# EAGLE board Two stage power demo(power routed) (EAGLE 5.10)
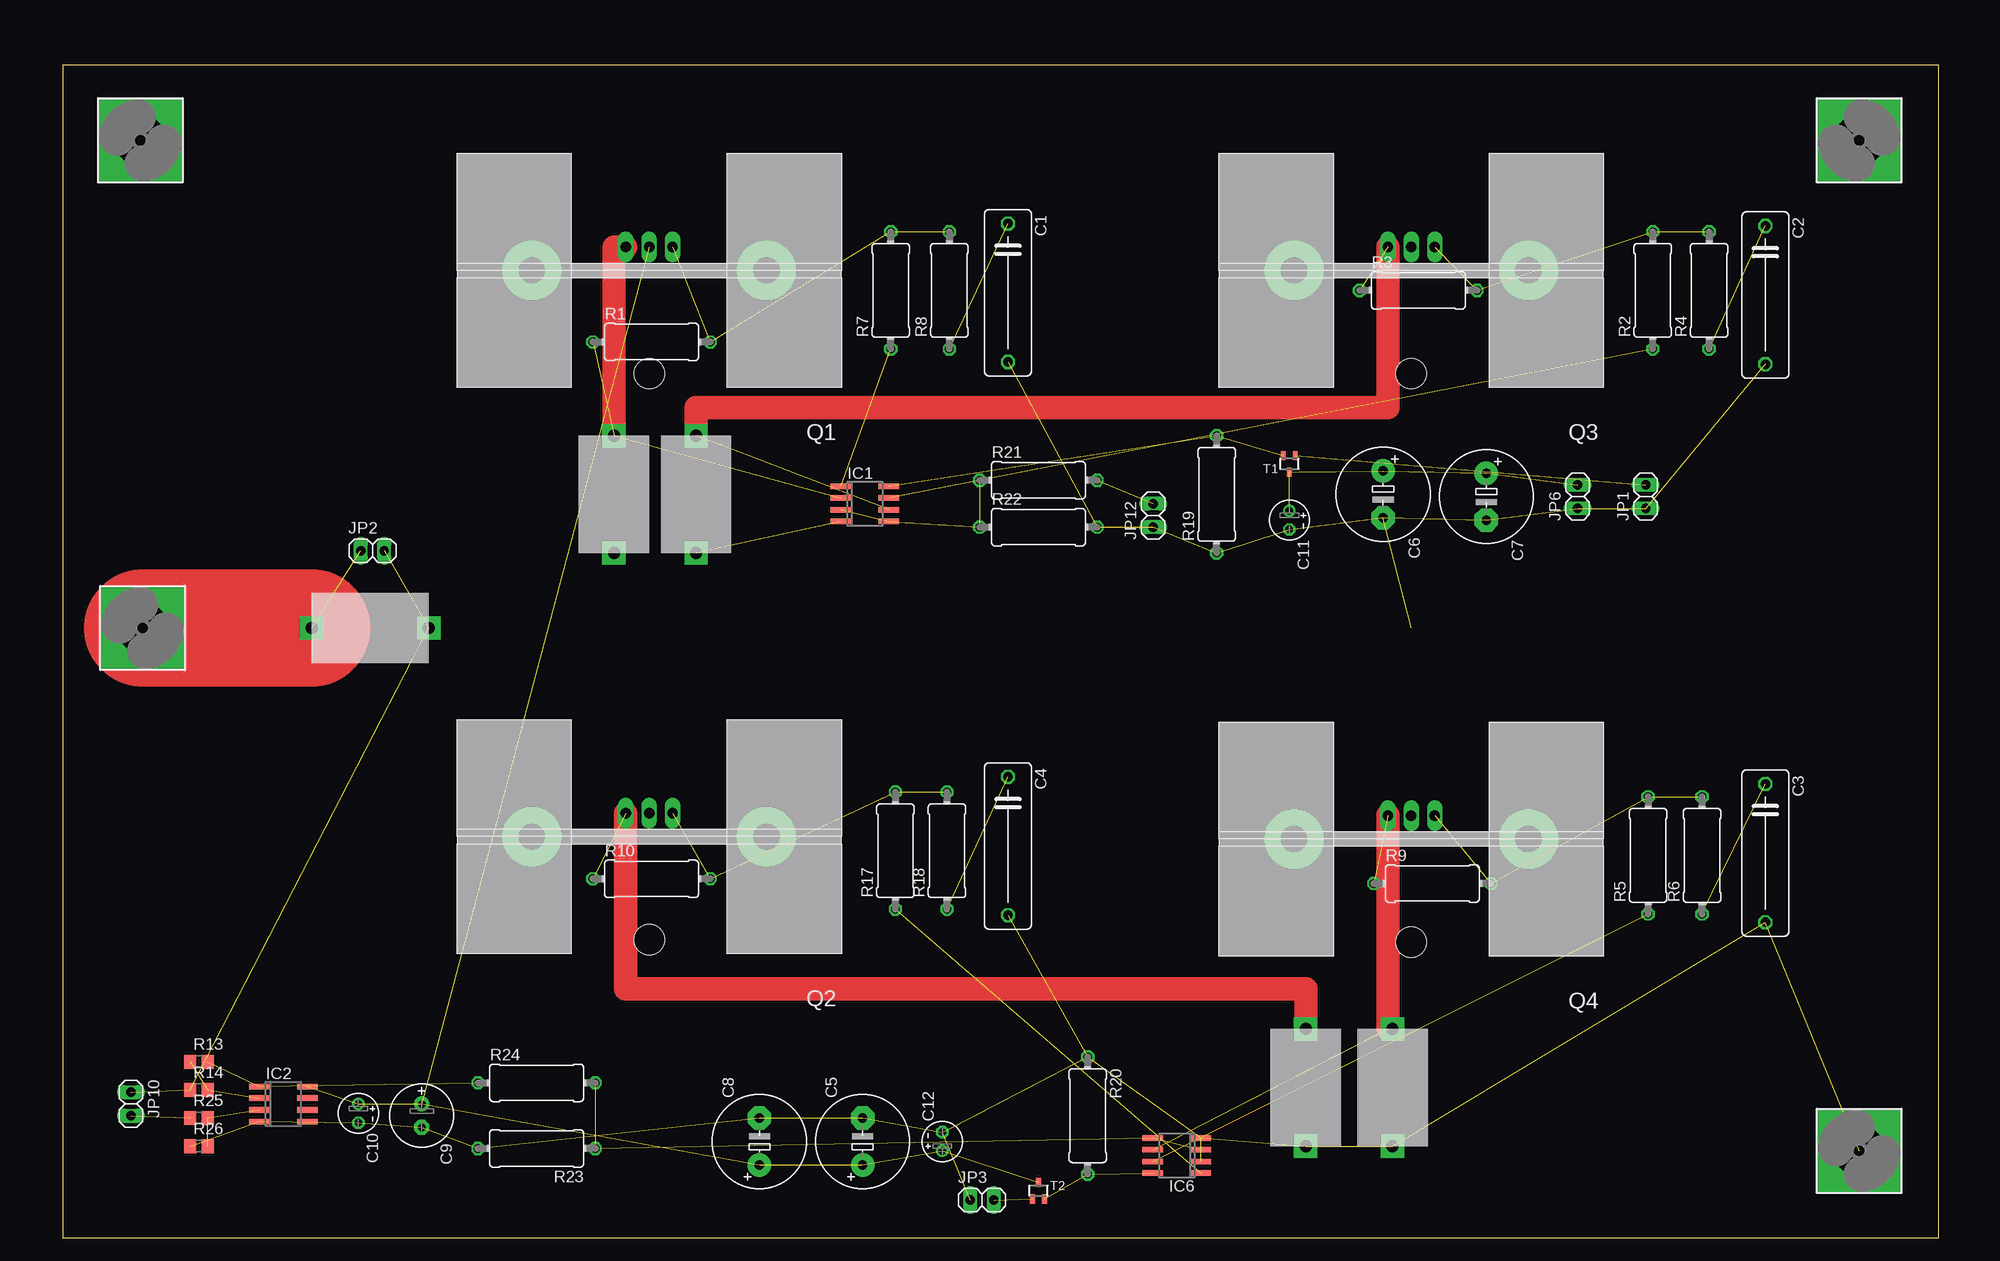
[diagram p0: board, top side]
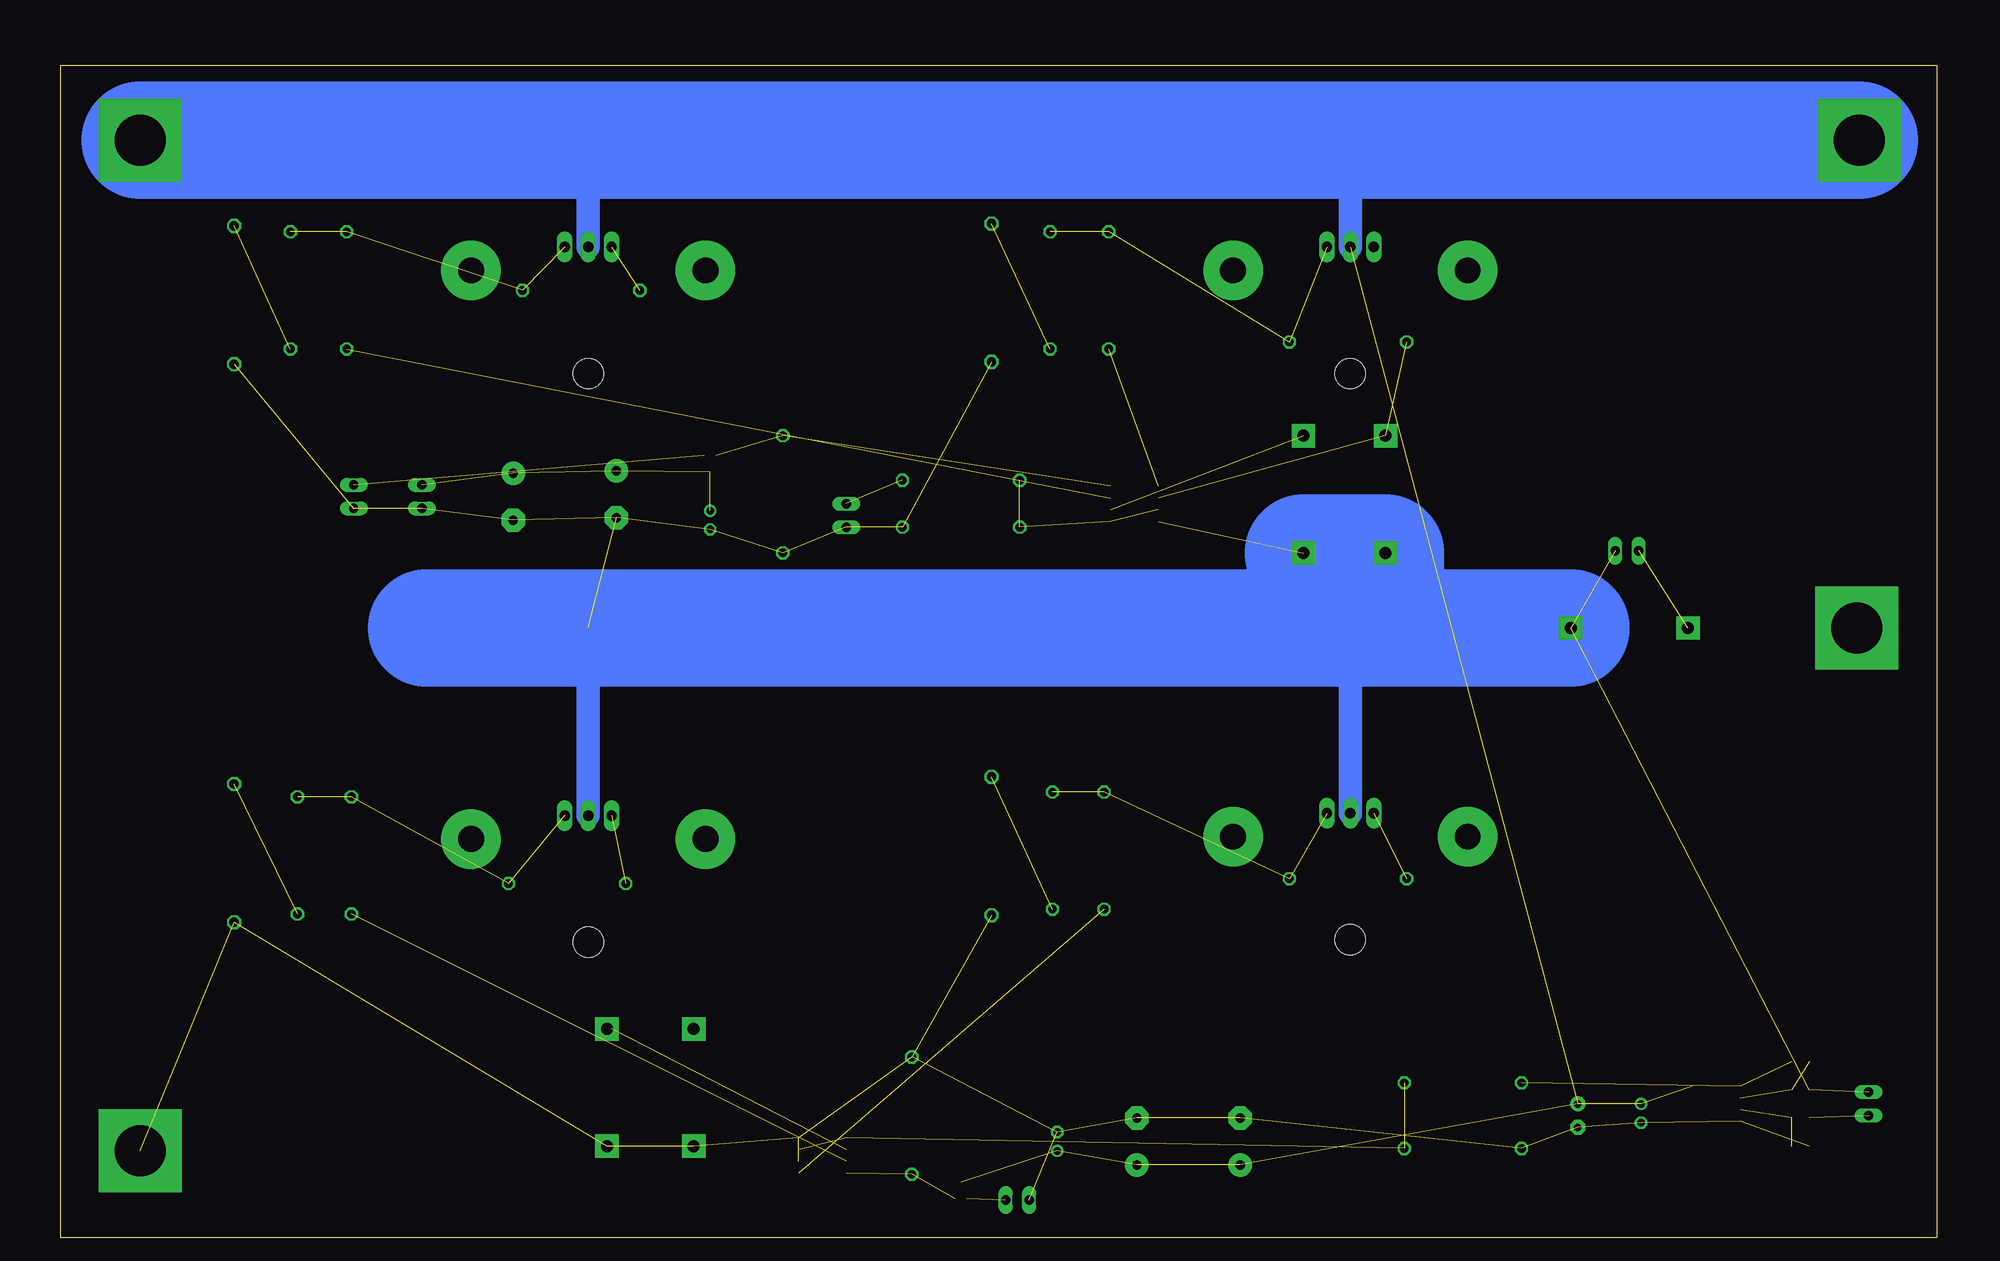
[diagram p1: board, bottom side, seen from below]

Size 203.2 x 127 mm. Coordinates in mm from the lower left corner, seen from the top.
Outline: 0,0 203.2,0 203.2,127 0,127 0,0
Copper layers (1*16): Top 0.035mm / dielectric 1.5mm / Bottom 0.035mm
Design rules "default *": minimum track width 16mil, minimum drill 24mil, track to track 8mil, track to pad 8mil, pad to pad 8mil, via to via 8mil, smd to smd 8mil, copper to edge 40mil, drill to drill 8mil, minimum pad ring 10mil, minimum via ring 8mil, stop-mask expansion 4mil, vias tented up to drill 0mil, thermal gap 10mil

## Footprints (pad centres in the part's own frame; a part is rotated, then mirrored left to right if it is on the bottom)
630HR050E = drill 1.3 pad 2.54 square: P$1 -6.35,0; P$2 6.35,0
5,5-PAD-SQUARE = drill 5.5 pad 9 square: B5,5 0,0
C150-054X183 = drill 1.016 octagon: 1 -7.493,0; 2 7.493,0
E5-10,5 = drill 1.016 pad 2.54 round: + -2.54,0 | drill 1.016 pad 2.54 octagon: - 2.54,0
E2,5-7 = drill 0.813 pad 1.6 round: + -1.27,0 | drill 0.813 pad 1.6 octagon: - 1.27,0
E2-4 = drill 0.813 pad 1.27 round: + -1.016,0 | drill 0.813 pad 1.27 octagon: - 1.016,0
SO08 = smd 0.6 x 2.2: 1 -1.905,-2.6; 2 -0.635,-2.6; 3 0.635,-2.6; 4 1.905,-2.6; 5 1.905,2.6; 6 0.635,2.6; 7 -0.635,2.6; 8 -1.905,2.6
1X02 = drill 1.016 long: 1 -1.27,0; 2 1.27,0
TO220-W/657-20ABP = drill 1.118 long: 1 -2.54,-2.54; 2 0,-2.54; 3 2.54,-2.54 | drill 2.8 pad 6.452 round: P$1 -12.7,0; P$2 12.7,0 | hole 3.302: 0,11.176
0411/12 = drill 0.914 octagon: 1 -6.35,0; 2 6.35,0
R0805 = smd 1.3 x 1.5: 1 -0.95,0; 2 0.95,0
SOT323 = smd 0.5 x 1: 1 0,0.9; 2 -0.65,-0.9; 3 0.65,-0.9

## Placement (x,y rotation side)
1  630HR050E  [630HR050E]  59.69,80.52 90 top
BATTERY-  MOUNT-PAD-SQUARE5.5  [5,5-PAD-SQUARE]  8.64,66.04 90 top
BATTERY/CHARGER+  MOUNT-PAD-SQUARE5.5  [5,5-PAD-SQUARE]  8.38,118.87 90 top
BATTERY/CHARGER+1  MOUNT-PAD-SQUARE5.5  [5,5-PAD-SQUARE]  194.56,118.87 0 top
C1  [C150-054X183]  102.36,102.36 270 top
C2  [C150-054X183]  184.4,102.11 270 top
C3  [C150-054X183]  184.4,41.66 270 top
C4  [C150-054X183]  102.36,42.42 270 top
C5  470u  [E5-10,5]  86.61,10.41 90 top
C6  470u  [E5-10,5]  143,80.52 270 top
C7  470u  [E5-10,5]  154.18,80.26 270 top
C8  470u  [E5-10,5]  75.44,10.41 90 top
C9  100u  [E2,5-7]  38.86,13.21 270 top
C10  0.1u  [E2-4]  32,13.46 270 top
C11  0.1u  [E2-4]  132.84,77.72 270 top
C12  0.1u  [E2-4]  95.25,10.41 90 top
CHARGER-  MOUNT-PAD-SQUARE5.5  [5,5-PAD-SQUARE]  194.56,9.4 90 top
IC1  OPA2277U  [SO08]  86.87,79.5 270 top
IC2  OPA2277U  [SO08]  23.88,14.48 270 top
IC6  OPA2277U  [SO08]  120.65,8.89 90 top
JP1  [1X02]  171.45,80.26 90 top
JP2  [1X02]  33.53,74.42 0 top
JP3  [1X02]  99.57,4.06 0 top
JP6  [1X02]  164.08,80.26 90 top
JP10  [1X02]  7.37,14.48 270 top
JP12  [1X02]  118.11,78.23 90 top
Q1  RFP12N10L  [TO220-W/657-20ABP]  63.5,104.78 180 top
Q2  RFP12N10L  [TO220-W/657-20ABP]  63.5,43.43 180 top
Q3  RFP12N10L  [TO220-W/657-20ABP]  146.05,104.78 180 top
Q4  RFP12N10L  [TO220-W/657-20ABP]  146.05,43.18 180 top
R1  100k  [0411/12]  63.75,97.03 0 top
R2  [0411/12]  172.21,102.62 90 top
R3  100k  [0411/12]  146.81,102.62 0 top
R4  [0411/12]  178.31,102.62 90 top
R5  [0411/12]  171.7,41.4 90 top
R6  [0411/12]  177.55,41.4 90 top
R7  [0411/12]  89.66,102.62 90 top
R8  [0411/12]  96.01,102.62 90 top
R9  100k  [0411/12]  148.34,38.35 0 top
R10  100k  [0411/12]  63.75,38.86 0 top
R13  100k  [R0805]  14.73,19.05 0 top
R14  100k  [R0805]  14.73,16 0 top
R17  [0411/12]  90.17,41.91 90 top
R18  [0411/12]  95.76,41.91 90 top
R19  [0411/12]  124.97,80.52 90 top
R20  [0411/12]  111,13.21 270 top
R21  15k  [0411/12]  105.66,82.04 0 top
R22  1k  [0411/12]  105.66,76.96 0 top
R23  1k  [0411/12]  51.31,9.65 180 top
R24  15k  [0411/12]  51.31,16.76 0 top
R25  100k  [R0805]  14.73,12.95 0 top
R26  100k  [R0805]  14.73,9.91 0 top
T1  [SOT323]  132.84,83.82 180 top
T2  [SOT323]  105.66,5.08 0 top
U$2  630HR050E  [630HR050E]  33.27,66.04 0 top
U$3  630HR050E  [630HR050E]  134.62,16.26 90 top
U$4  630HR050E  [630HR050E]  68.58,80.52 90 top
U$5  630HR050E  [630HR050E]  144.02,16.26 90 top

## Library data of the parts
1 Q1-Q4 U$2-U$5 = NEWPARTS
BATTERY- BATTERY/CHARGER+ BATTERY/CHARGER+1 CHARGER- = holes
C1-C12 R1-R10 R13 R14 R17-R26 = rcl
IC1 IC2 IC6 = linear
JP1-JP3 JP6 JP10 JP12 = pinhead
T1 T2 = zetex

## Nets
+5V: C6.+ C7.+ C11.+ JP6.2 T1.1
GND: 1.P$1 C1.2 C2.2 C6.- C7.- C11.- IC1.4 JP1.1 JP2.2 JP6.1 JP10.1 JP12.1 Q2.2 Q4.2 R14.1 R19.1 R22.2 U$2.P$2 U$4.P$1
LOAD: BATTERY/CHARGER+1.B5,5 BATTERY/CHARGER+.B5,5 C5.+ C8.+ C9.+ C10.+ C12.+ IC2.8 Q1.2 Q3.2 T2.1
N$1: IC1.7 R2.1
N$2: Q2.3 R10.1 U$3.P$2
N$3: C3.2 C4.2 C5.- C8.- C9.- C10.- C12.- CHARGER-.B5,5 IC2.4 IC6.2 IC6.4 JP3.1 R20.1 R23.2 R26.1 U$3.P$1 U$5.P$1
N$4: IC2.2 R13.1 R14.2
N$5: BATTERY-.B5,5 JP2.1 U$2.P$1
N$6: IC1.8 R19.2 T1.3
N$7: JP1.2 T1.2
N$8: IC2.1 R13.2 R24.1
N$9: IC1.6 Q3.3 R3.1 U$4.P$2
N$10: Q1.1 R1.2 R7.2 R8.2
N$11: IC1.3 IC1.5 R21.1 R22.1
N$12: IC6.6 Q4.3 R9.1 U$5.P$2
N$13: C1.1 R8.1
N$14: Q3.1 R2.2 R3.2 R4.2
N$15: C2.1 R4.1
N$16: Q4.1 R5.2 R6.2 R9.2
N$18: C3.1 R6.1
N$19: IC2.3 R25.2 R26.2
N$20: Q2.1 R10.2 R17.2 R18.2
N$21: 1.P$2 IC1.2 Q1.3 R1.1
N$22: C4.1 R18.1
N$23: IC1.1 R7.1
N$25: IC6.7 R5.1
N$26: IC6.1 R17.1
N$27: JP12.2 R21.2
N$28: JP10.2 R25.1
N$29: IC6.8 R20.2 T2.3
N$30: IC6.3 IC6.5 R23.1 R24.2
N$32: JP3.2 T2.2

## Tracks (layer width: path | path; a pad name or v marks a point on that pad's centre or on a via)
+5V  (4 unrouted)
GND  (14 unrouted)
  Bottom 12.7: U$2.P$2 59.69,66.04 | U$4.P$1 1.P$1 59.69,66.04 | 59.69,66.04 63.25,66.04 163.58,66.04
  Bottom 2.54: 163.58,66.04 146.05,66.04 Q4.2 | Q2.2 63.5,66.55 63.25,66.55 63.25,66.04
LOAD  (7 unrouted)
  Bottom 12.7: BATTERY/CHARGER+1.B5,5 145.8,118.87 63.5,118.87 BATTERY/CHARGER+.B5,5
  Bottom 2.54: 63.5,118.87 Q1.2 | Q3.2 146.05,123.95 145.8,123.95 145.8,118.87
N$1  (1 unrouted)
N$2  (1 unrouted)
  Top 2.54: U$3.P$2 134.62,26.92 60.96,26.92 Q2.3
N$3  (16 unrouted)
N$4  (2 unrouted)
N$5  (1 unrouted)
  Top 12.7: BATTERY-.B5,5 U$2.P$1
N$6  (2 unrouted)
N$7  (1 unrouted)
N$8  (2 unrouted)
N$9  (2 unrouted)
  Top 2.54: U$4.P$2 68.58,89.92 143.51,89.92 Q3.3
N$10  (3 unrouted)
N$11  (3 unrouted)
N$12  (2 unrouted)
  Top 2.54: Q4.3 143.51,22.61 U$5.P$2
N$13  (1 unrouted)
N$14  (3 unrouted)
N$15  (1 unrouted)
N$16  (3 unrouted)
N$18  (1 unrouted)
N$19  (2 unrouted)
N$20  (3 unrouted)
N$21  (2 unrouted)
  Top 2.54: Q1.3 59.69,107.31 1.P$2
N$22  (1 unrouted)
N$23  (1 unrouted)
N$25  (1 unrouted)
N$26  (1 unrouted)
N$27  (1 unrouted)
N$28  (1 unrouted)
N$29  (2 unrouted)
N$30  (3 unrouted)
N$32  (1 unrouted)